# Altium PCB PCB1.PcbDoc (part 1 of 2)
Units mm, origin at the board's own origin, x right, y up, seen from the top; angles counter-clockwise.
Board outline 99.19 x 99.06 mm, 2 copper layers (Top Layer, Bottom Layer); 87 components, 74 nets, 377 pads, 55 vias.
Unrouted connection lines stored in the file: 5.
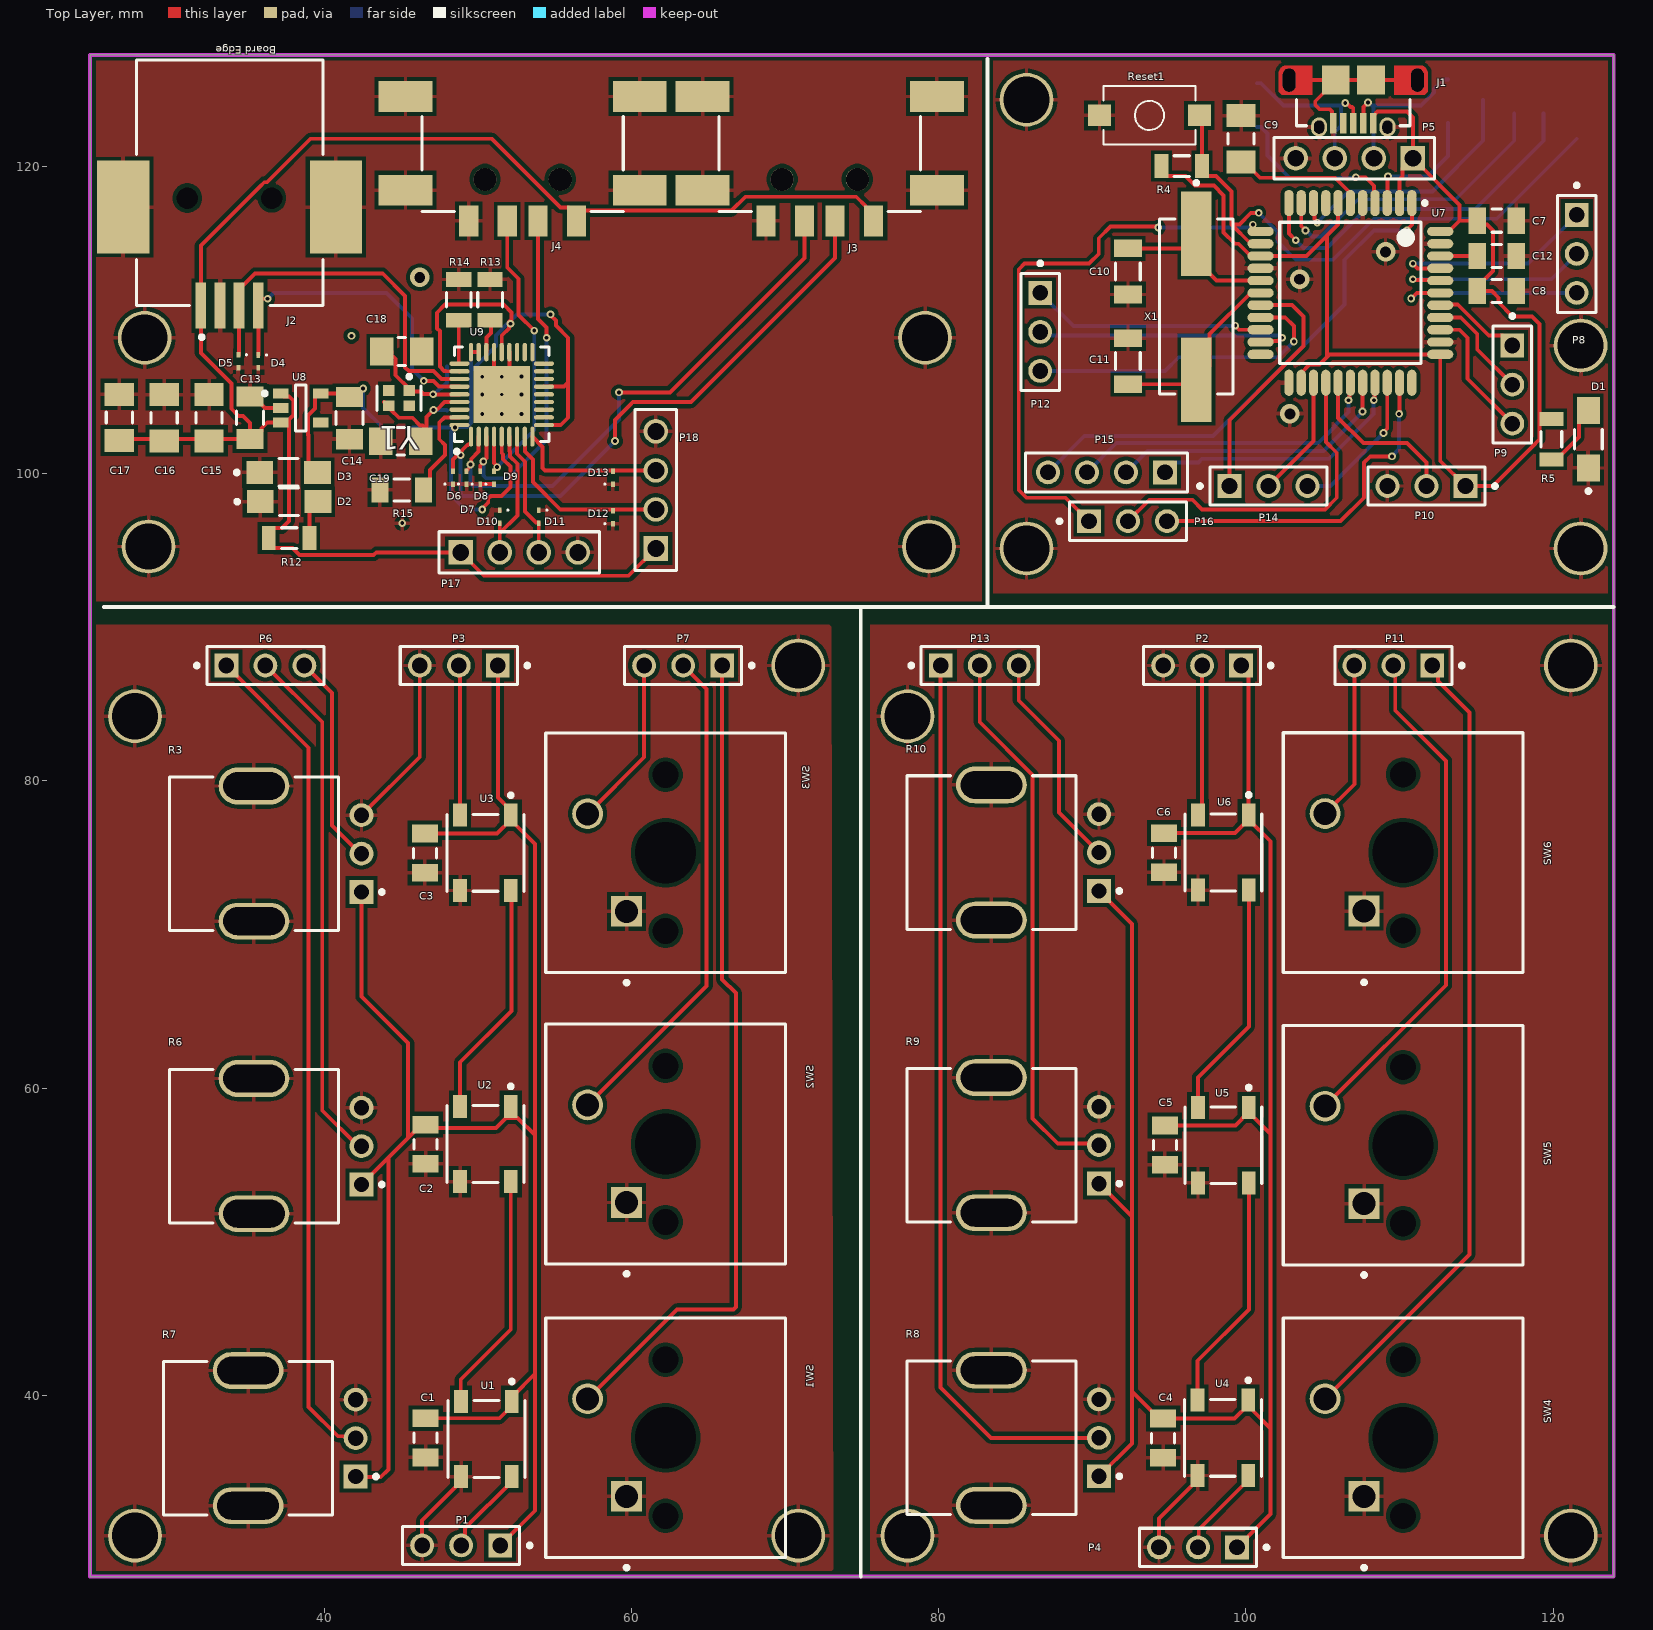
[diagram p0: Top Layer view]
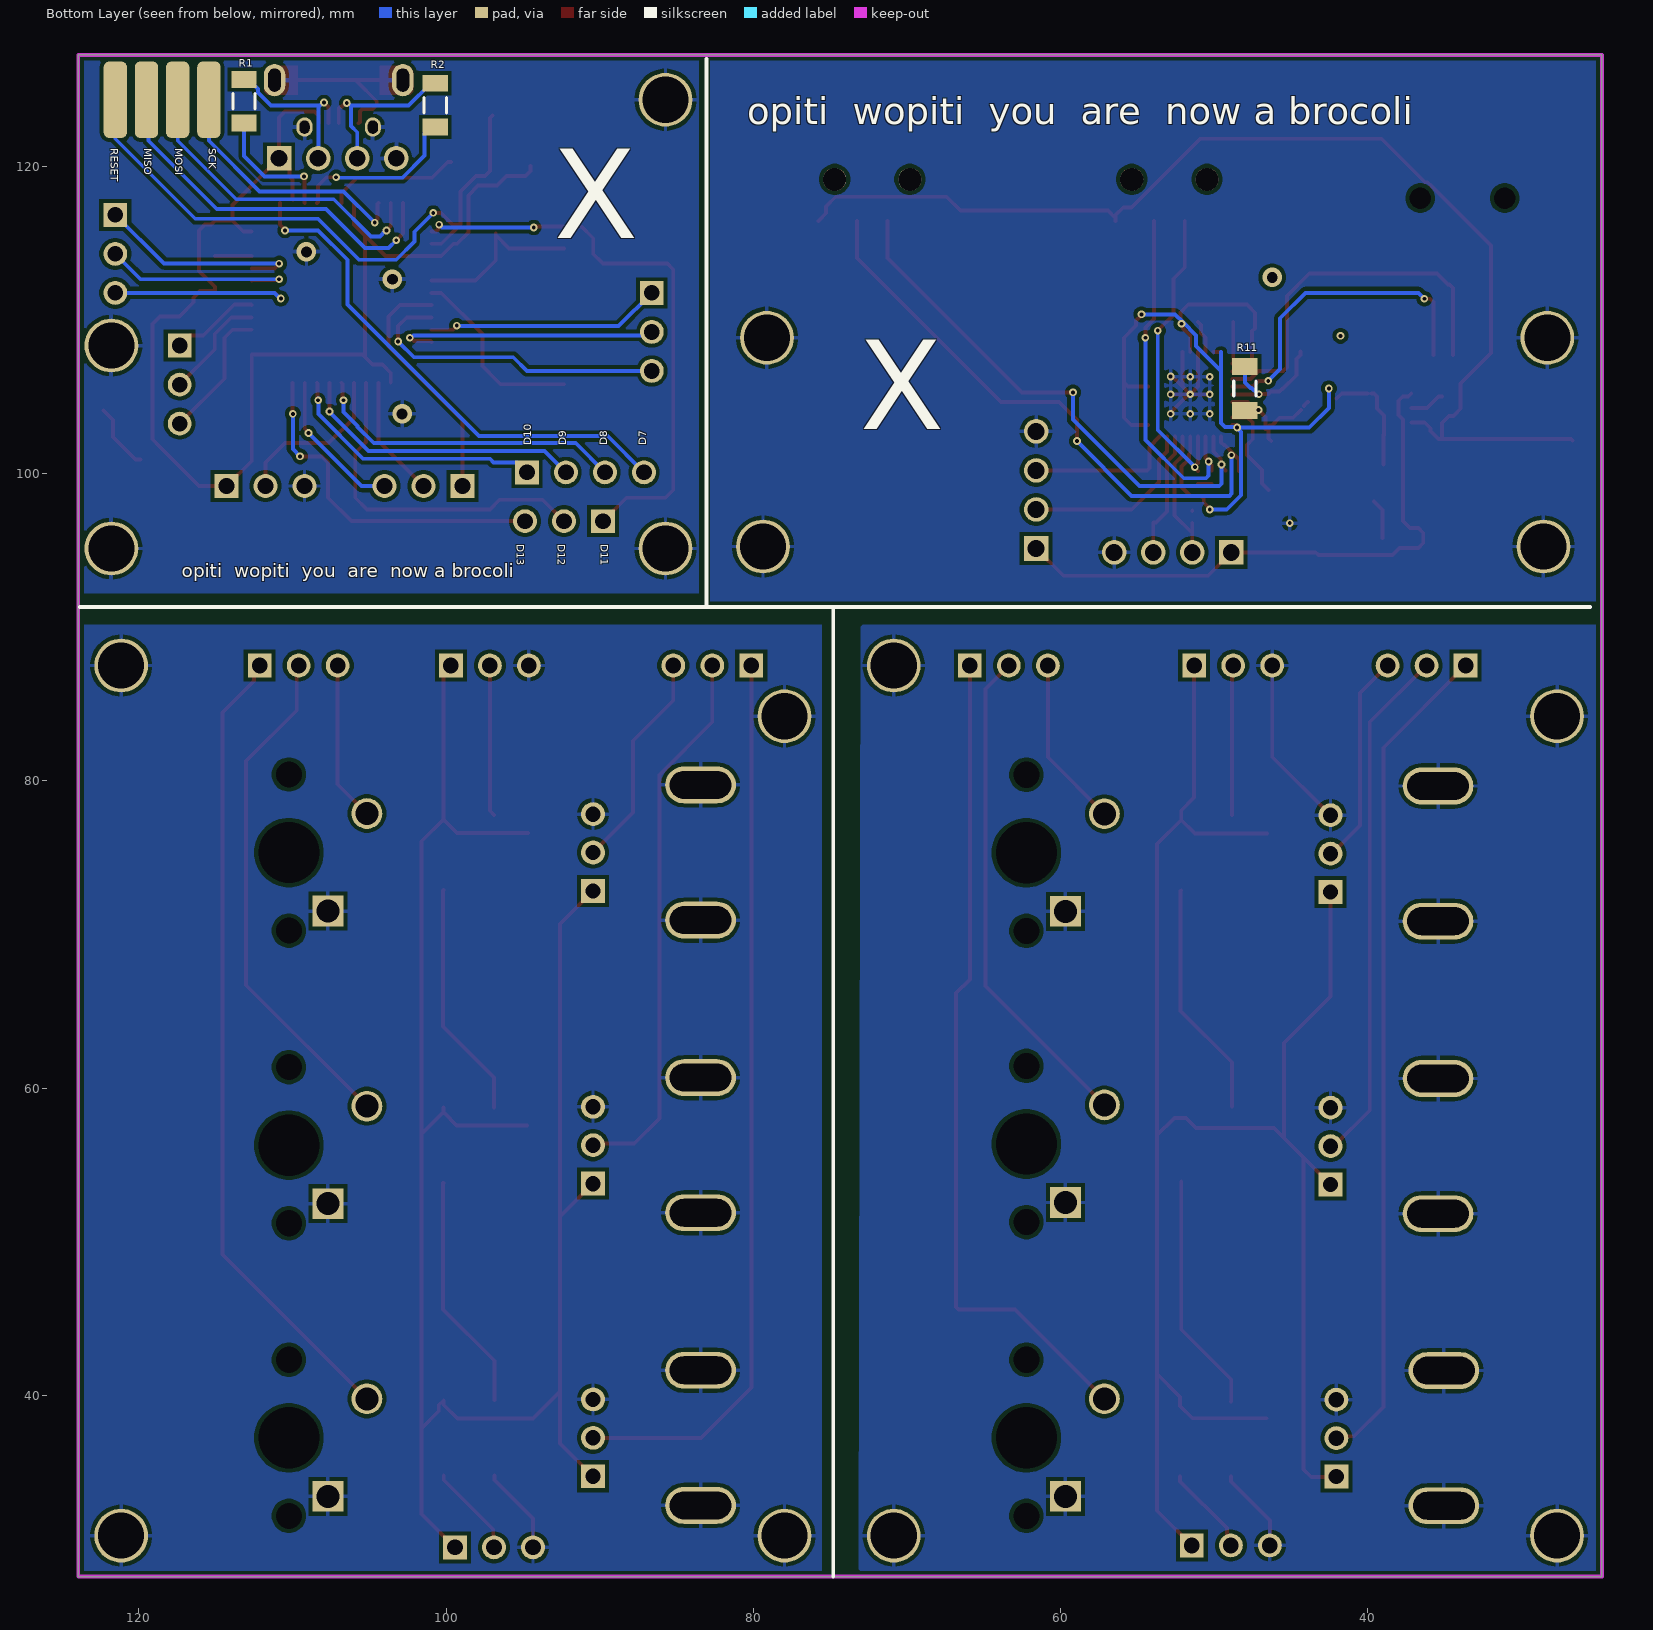
[diagram p1: Bottom Layer view, seen from below]
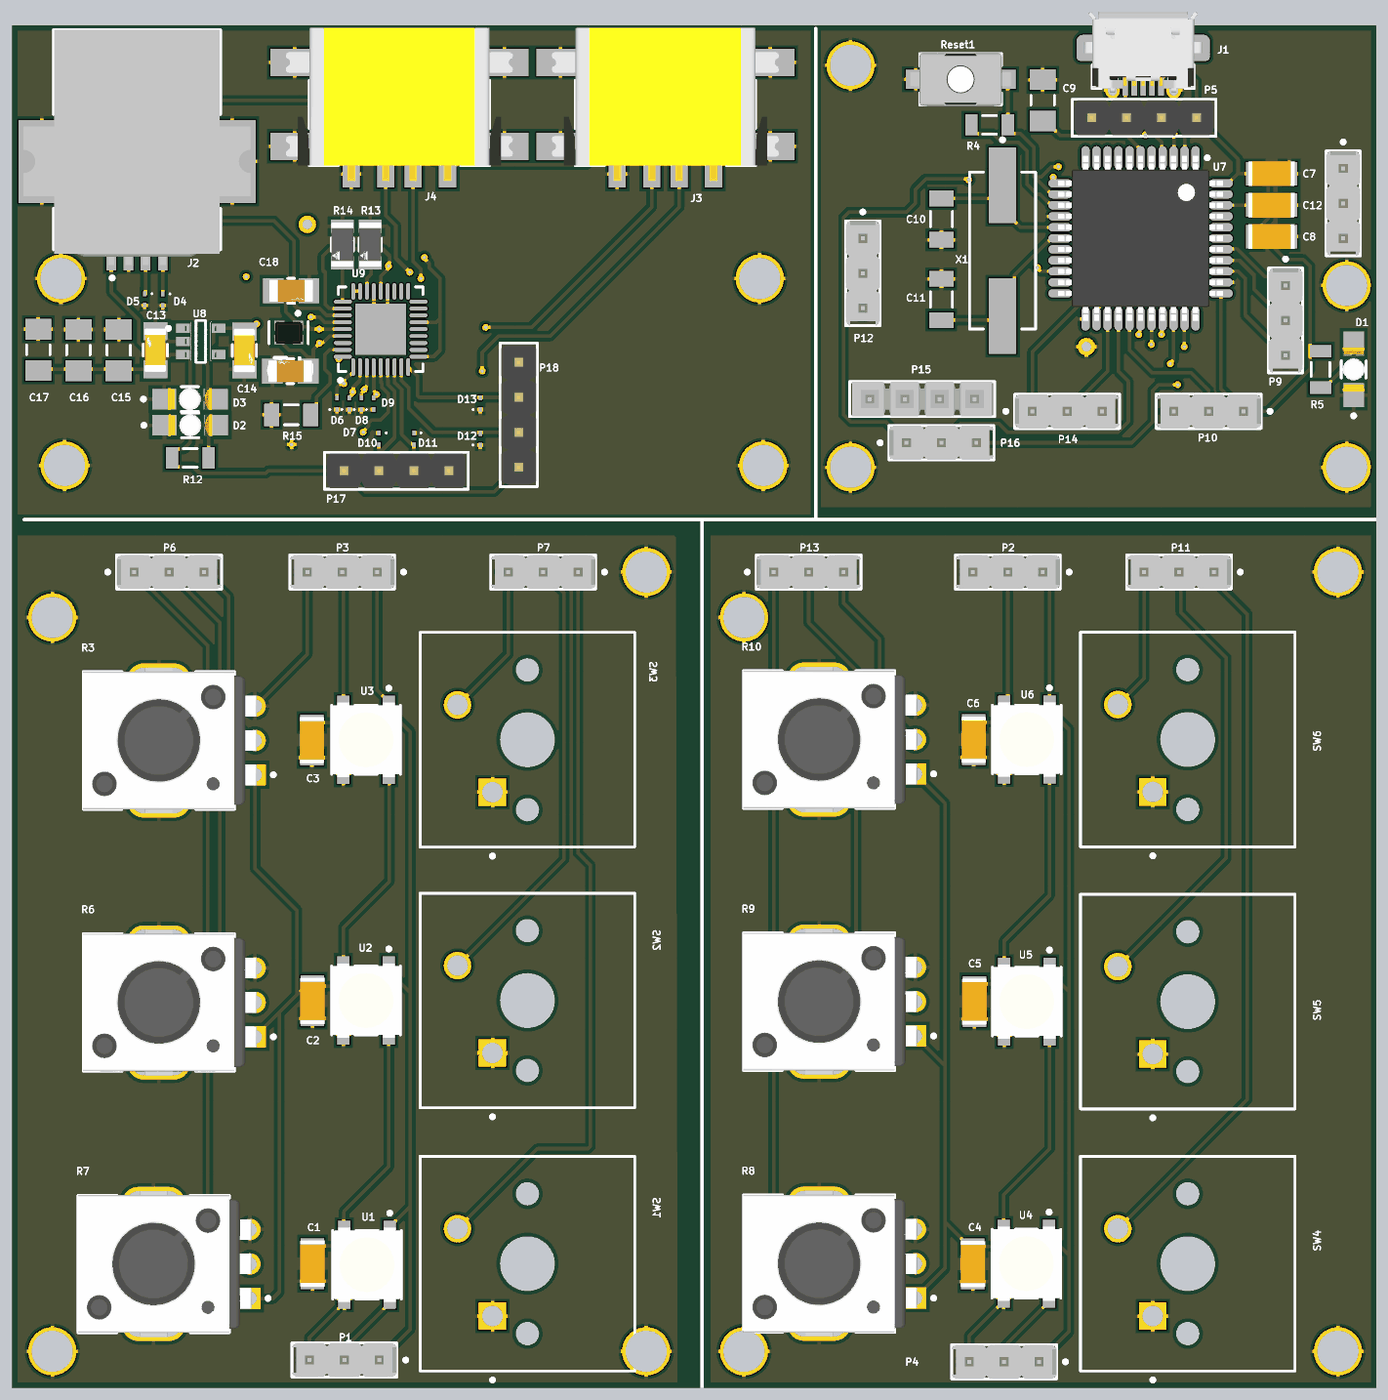
[diagram p2: 3D render of the assembled board from above, using the file's embedded part models]

## Layer stack, top to bottom
Top Solder: solder mask 0.0102, Solder Resist, Dk 3.5
Top Layer: signal copper 0.0356
Dielectric 1: dielectric 0.32, FR-4, Dk 4.8
Bottom Layer: signal copper 0.0356
Bottom Solder: solder mask 0.0102, Solder Resist, Dk 3.5

## Board outline
24.765,28.194 24.765,127.254 123.952,127.254 123.952,28.194

## Design rules (kind name [scope] priority, off if disabled: settings)
Clearance Clearance_1 [All] p1: gap=0.254 ignorepadtopadclearanceinfootprint=FALSE except(0: Arc-Hole Track-Hole SMDPad-Hole THPad-Hole Via-Hole Fill-Hole Poly-Hole Region-Hole Text-Hole)
Clearance [All] p2: gap=0.254 ignorepadtopadclearanceinfootprint=FALSE except(0: Arc-Hole Track-Hole SMDPad-Hole THPad-Hole Via-Hole Fill-Hole Poly-Hole Region-Hole Text-Hole; 0.2: Arc-Arc Arc-Track Arc-SMDPad Track-Track Track-SMDPad SMDPad-SMDPad SMDPad-THPad THPad-THPad)
PolygonConnect [All] p1: connectstyle=Relief reliefconductorwidth=0.254 reliefentries=4 polygonreliefangle="90 Angle" airgapwidth=0.254
RoutingVias [All] p1: holewidth=0.711 width=1.27 viastyle="Through Hole" minholewidth=0.2 minwidth=0.45 maxholewidth=0.711 maxwidth=1.27
SolderMaskExpansion [All] p1: expansion=0.102 istentingtop=FALSE
Width [All] p1: maxlimit=0.254 minlimit=0.254 preferedwidth=0.254
30 further rules are at their usual default settings.

## Classes and differential pairs
component class "usb HUB": C13 C14 C15 C16 C17 C18 C19 D2 D3 D4 D5 D6 D7 D8 D9 D10 D11 D12 D13 J2 J3 J4 P17 P18 R11 R12 R13 R14 R15 U8 U9 Y1
component class Deej: C1 C2 C3 C4 C5 C6 C7 C8 C9 C10 C11 C12 D1 J1 P1 P2 P3 P4 P5 P6 P7 P8 P9 P10 P11 P12 P13 P14 P15 P16 R1 R2 R3 R4 R5 R6 R7 R8 R9 R10 Reset1 SW1 SW2 SW3 SW4 SW5 SW6 U1 U2 U3 U4 U5 U6 U7 X1

## Components (designator, comment, footprint, x,y, rotation, side; value= is the part's Value field where it differs from the comment)
C1 "GRM31C5C1E104JA01L" CAPC3216X180X55LL20T25 46.61,37.23 r90 top
C2 "GRM31C5C1E104JA01L" CAPC3216X180X55LL20T25 46.604,56.34 r90 top
C3 "GRM31C5C1E104JA01L" CAPC3216X180X55LL20T25 46.56,75.291 r90 top
C4 "GRM31C5C1E104JA01L" CAPC3216X180X55LL20T25 94.615,37.211 r90 top
C5 "GRM31C5C1E104JA01L" CAPC3216X180X55LL20T25 94.733,56.288 r90 top
C6 "GRM31C5C1E104JA01L" CAPC3216X180X55LL20T25 94.675,75.318 r90 top
C7 "GRM31C5C1E104JA01L" CAPC3216X180X55LL20T25 116.332,116.459 r180 top
C8 "GRM31C5C1E104JA01L" CAPC3216X180X55LL20T25 116.332,111.887 r180 top
C9 "C1206C105K3RACTU" CAPC3216X180X50ML20T25 99.695,121.793 r90 top
C10 "CAP 22pF 50V 1206(3216)" CAPC1206(3216)100_N 92.329,113.157 r90 top value=22nF
C11 "CAP 22 pF 50V 1206(3216)" CAPC1206(3216)100_N 92.329,107.315 r270 top value=22nF
C12 "GRM31C5C1E104JA01L" CAPC3216X180X55LL20T25 116.332,114.173 r180 top
C13 "CL31B105MAHNNNE" FP-CL31-IPC_B 35.179,103.632 r90 top
C14 "CL31B105MAHNNNE" FP-CL31-IPC_B 41.656,103.611 r270 top
C15 "12061Z475KAT2A" CAPC3216X190X50ML20T25 32.512,103.632 r90 top
C16 "12061Z475KAT2A" CAPC3216X190X50ML20T25 29.591,103.632 r90 top
C17 "12061Z475KAT2A" CAPC3216X190X50ML20T25 26.67,103.656 r90 top
C18 "GRM31A7U2J180JW31D" FP-GRM31A-0_2-e0_3_0_95-IPC_B 45.054,107.95 r0 top
C19 "GRM31A7U2J180JW31D" FP-GRM31A-0_2-e0_3_0_95-IPC_B 44.989,102.108 r180 top
D1 "APTD3216CGCK" FP-APTD3216CGCK-MFG 122.301,102.235 r90 top
D2 "APTD3216CGCK" FP-APTD3216CGCK-MFG 37.719,98.171 r0 top
D3 "APTD3216CGCK" FP-APTD3216CGCK-MFG 37.689,100.072 r0 top
D4 "ESD9B3.3ST5G" ONSC-SOD-923-2-514AB-01_V 35.717,107.297 r270 top
D5 "ESD9B3.3ST5G" ONSC-SOD-923-2-514AB-01_V 34.417,107.315 r270 top
D6 "ESD9B3.3ST5G" ONSC-SOD-923-2-514AB-01_V 48.387,99.734 r90 top
D7 "ESD9B3.3ST5G" ONSC-SOD-923-2-514AB-01_V 49.276,99.734 r90 top
D8 "ESD9B3.3ST5G" ONSC-SOD-923-2-514AB-01_V 50.165,99.734 r90 top
D9 "ESD9B3.3ST5G" ONSC-SOD-923-2-514AB-01_V 51.054,99.734 r90 top
D10 "ESD9B3.3ST5G" ONSC-SOD-923-2-514AB-01_V 51.435,97.194 r270 top
D11 "ESD9B3.3ST5G" ONSC-SOD-923-2-514AB-01_V 53.975,97.194 r270 top
D12 "ESD9B3.3ST5G" ONSC-SOD-923-2-514AB-01_V 58.801,97.155 r90 top
D13 "ESD9B3.3ST5G" ONSC-SOD-923-2-514AB-01_V 58.801,99.734 r90 top
J1 "629105150921" 629105150921 106.995,125.61 r180 top
J2 "1734346-1" TECO-1734346-1_V 33.847,110.928 r90 top locked
J3 "629104190121" 629104190121 72.263,122.047 r180 top
J4 "629104190121" 629104190121 52.922,122.047 r180 top
P1 "22-28-4033" MOLX-22-28-4033_V 48.92,30.226 r180 top
P2 "22-28-4033" MOLX-22-28-4033_V 97.155,87.503 r180 top
P3 "22-28-4033" MOLX-22-28-4033_V 48.768,87.503 r180 top
P4 "22-28-4033" MOLX-22-28-4033_V 96.887,30.099 r180 top
P5 "61300411121" 61300411121 107.061,120.523 r180 top
P6 "22-28-4033" MOLX-22-28-4033_V 36.178,87.503 r0 top
P7 "22-28-4033" MOLX-22-28-4033_V 63.373,87.503 r180 top
P8 "22-28-4033" MOLX-22-28-4033_V 121.539,114.3 r270 top
P9 "22-28-4033" MOLX-22-28-4033_V 117.348,105.791 r270 top
P10 "22-28-4033" MOLX-22-28-4033_V 111.76,99.187 r180 top
P11 "22-28-4033" MOLX-22-28-4033_V 109.601,87.503 r180 top
P12 "22-28-4033" MOLX-22-28-4033_V 86.614,109.22 r270 top
P13 "22-28-4033" MOLX-22-28-4033_V 82.677,87.503 r0 top
P14 "22-28-4033" MOLX-22-28-4033_V 101.473,99.187 r0 top
P15 "TSW-104-08-T-S" SMTC-TSW-104-08-X-S 94.742,100.076 r180 top
P16 "22-28-4033" MOLX-22-28-4033_V 92.329,96.901 r0 top
P17 "61300411121" 61300411121 52.705,94.869 r0 top
P18 "61300411121" 61300411121 61.595,98.933 r90 top
R1 "ERJ-8GEYJ220V" RESC3216X70X50NL05T20 113.157,124.234 r270 bottom
R2 "ERJ-8GEYJ220V" RESC3216X70X50NL05T20 100.711,123.98 r270 bottom
R3 "PTV09A-4020U-B103" FP-PTV09A-4-MFG 35.433,75.261 r90 top value=10kΩ
R4 "ERJ-P08J103V" RESC3216X70X50LL05T20 95.83,120.015 r0 top
R5 "ERJ8ENF2203V" RESC3216X70X50LL05T20 119.888,102.235 r270 top
R6 "PTV09A-4020U-B103" FP-PTV09A-4-MFG 35.433,56.221 r90 top value=10kΩ
R7 "PTV09A-4020U-B103" FP-PTV09A-4-MFG 35.052,37.211 r90 top value=10kΩ
R8 "PTV09A-4020U-B103" FP-PTV09A-4-MFG 83.439,37.23 r90 top value=10kΩ
R9 "PTV09A-4020U-B103" FP-PTV09A-4-MFG 83.439,56.28 r90 top value=10kΩ
R10 "PTV09A-4020U-B103" FP-PTV09A-4-MFG 83.439,75.33 r90 top value=10kΩ
R11 "ERJ-8ENF1004V" RESC3216X70X50NL05T20 48.006,105.537 r270 bottom
R12 "ERJ8ENF2203V" RESC3216X70X50LL05T20 37.719,95.799 r0 top
R13 "CRCW120656K0FKEA" FP-CRCW1206-e3-IPC_C 50.8,111.308 r270 top
R14 "CRCW120656K0FKEA" FP-CRCW1206-e3-IPC_C 48.768,111.308 r270 top
R15 "ERJ-8GEYJ123V" RESC3216X70X50NL05T20 45.057,98.933 r180 top
Reset1 "434121025816" 434121025816 93.726,123.317 r0 top
SW1 "MX1A-11NW" CHRY-MX1A-11NW_V 62.23,37.23 r90 top
SW2 "MX1A-11NW" CHRY-MX1A-11NW_V 62.23,56.358 r90 top
SW3 "MX1A-11NW" CHRY-MX1A-11NW_V 62.23,75.311 r90 top
SW4 "MX1A-11NW" CHRY-MX1A-11NW_V 110.236,37.23 r90 top
SW5 "MX1A-11NW" CHRY-MX1A-11NW_V 110.236,56.28 r90 top
SW6 "MX1A-11NW" CHRY-MX1A-11NW_V 110.236,75.33 r90 top
U1 "WS2812B" ADAI-WS2812B_V 50.57,37.151 r270 top
U2 "WS2812B" ADAI-WS2812B_V 50.502,56.358 r270 top
U3 "WS2812B" ADAI-WS2812B_V 50.502,75.311 r270 top
U4 "WS2812B" ADAI-WS2812B_V 98.508,37.23 r270 top
U5 "WS2812B" ADAI-WS2812B_V 98.537,56.28 r270 top
U6 "WS2812B" ADAI-WS2812B_V 98.537,75.33 r270 top
U7 "ATMEGA32U4-AU" ATML-44ML_M 106.807,111.76 r270 top
U8 "MIC5504-3.3YM5-TR" FP-SOT23-5LD-PL-1-MFG 38.481,104.267 r0 top
U9 "USB2514B-AEZC" MCHP-QFN-36_V 51.562,105.156 r90 top
X1 "9C-3.6864MBBK-T" TXC-9C-2_V 96.774,110.871 r270 top
Y1 "Crys_Murata_XRCGB24M000F0L00R0_eec" Murata_XRCGB24M000F0L00R0_0 44.871,104.91 r180 top

## Footprints (in the part's own frame and the unit in brackets; to place one, negate y for a bottom-side part, rotate by r counter-clockwise, add the part's x,y. Pads: shape width x height; smd on the part's side, far side on the other; paste and mask are expansions set on the pad)
61300411121 [mm] "Pin Header, pitch 2.54 mm, THT, Vertical, single row, 4p"
  rect 1.6x1.6 hole 1.1: 1(-3.81,0)
  round 1.6 hole 1.1: 2(-1.27,0) 3(1.27,0) 4(3.81,0)
  silkscreen extent -5.23,-1.35 5.23,1.35, body extent -5.08,-1.27 5.08,1.27, height 8.57
434121025816 [mm] "6.0*3.8mm vertical type, SMD, height 2.5mm, black actuator, 160gf, T&R"
  rect 1.5x1.4 smd: 1(-3.25,0) 2(3.25,0)
  silkscreen extent -3,-1.9 3,1.9, body extent -3.65,-1.95 3.65,1.95, height 2.5
629104190121 [mm] "USB 2.0 Type A Horizontal SMT Short Type"
  rect 1.25x2 smd: 1(-3.5,5.6) 2(-1,5.6) 3(1,5.6) 4(3.5,5.6)
  round 1.5 hole 1.5 unplated: MH1(-2.45,2.9) MH2(2.45,2.9)
  rect 3.5x2 smd: Shell(-7.625,-2.5) Shell(-7.625,3.6) Shell(7.625,-2.5) Shell(7.625,3.6)
  silkscreen extent -6.55,-1.2 6.55,5, body extent -8.25,-5 8.25,6.11, height 6.35
629105150921 [mm] "Micro USB 2.0 Type AB Horizontal"
  rect 0.4x1.35 smd: 1(-1.3,2.805) 2(-0.65,2.805) 3(0,2.805) 4(0.65,2.805) 5(1.3,2.805)
  round 0 / inner oval 1.4x2.1 / far side oval 1.4x2.1 hole 0.825 slot 1.5 at 90 deg mask+0.102: Shell(-4.175,0)
  oval 1.05x1.25 hole 0.65 slot 0.85 at 90 deg: Shell(-2.225,3.055) Shell(2.225,3.055)
  rect 1.8x1.9 smd: Shell(-1.15,0) Shell(1.15,0)
  round 0 / inner round 0 / far side oval 1.4x2.1 hole 0.825 slot 1.5 at 90 deg mask+0.102: Shell(4.175,0)
  Top Layer region: 4.353,-0.95 4.544,-0.912 4.706,-0.804 4.814,-0.641 4.852,-0.45 4.852,-0.45 4.852,0.65 4.83,0.765 4.765,0.862 4.667,0.927 4.553,0.95 4.553,0.95 2.668,0.95 2.668,-0.95
  Top Layer region: -4.353,-0.95 -4.544,-0.912 -4.706,-0.804 -4.814,-0.641 -4.852,-0.45 -4.852,-0.45 -4.852,0.65 -4.83,0.765 -4.765,0.862 -4.667,0.927 -4.553,0.95 -4.553,0.95 -2.668,0.95 -2.668,-0.95
  silkscreen extent -3.7,1.25 3.7,2.97, body extent -4.3,-2.64 4.3,3.23, height 2.76
ADAI-WS2812B_V [mm] "SMD, 4-Leads, Body 5x5mm, Pitch 3.3mm"
  rect 1.5x0.9 smd: 1(-2.45,1.65) 2(-2.45,-1.65) 3(2.45,-1.65) 4(2.45,1.65)
  silkscreen extent -3.87,-2.5 2.5,2.5, body extent -2.7,-2.5 2.7,2.5, height 1.69
ATML-44ML_M [mm] "TQFP, 44-Leads, Body 10x10mm, Pitch 0.8mm, IPC Low Density"
  oval 1.7x0.6 smd: 1(-5.85,4) 2(-5.85,3.2) 3(-5.85,2.4) 4(-5.85,1.6) 5(-5.85,0.8) 6(-5.85,0) 7(-5.85,-0.8) 8(-5.85,-1.6) 9(-5.85,-2.4) 10(-5.85,-3.2) 11(-5.85,-4) 23(5.85,-4) 24(5.85,-3.2) 25(5.85,-2.4) 26(5.85,-1.6) 27(5.85,-0.8) 28(5.85,0) 29(5.85,0.8) 30(5.85,1.6) 31(5.85,2.4) 32(5.85,3.2) 33(5.85,4)
  oval 0.6x1.7 smd: 12(-4,-5.85) 13(-3.2,-5.85) 14(-2.4,-5.85) 15(-1.6,-5.85) 16(-0.8,-5.85) 17(0,-5.85) 18(0.8,-5.85) 19(1.6,-5.85) 20(2.4,-5.85) 21(3.2,-5.85) 22(4,-5.85) 34(4,5.85) 35(3.2,5.85) 36(2.4,5.85) 37(1.6,5.85) 38(0.8,5.85) 39(0,5.85) 40(-0.8,5.85) 41(-1.6,5.85) 42(-2.4,5.85) 43(-3.2,5.85) 44(-4,5.85)
  silkscreen extent -5.97,-4.6 4.6,4.98, body extent -6,-6 6,6, height 1.2
CAPC1206(3216)100_N [mm] "Chip Capacitor, Body 3.2x1.6mm, Height 1mm, IPC Medium Density"
  rect 1.15x1.8 smd: 1(-1.5,0) 2(1.5,0)
  silkscreen extent -0.55,-0.8 0.55,0.8, body extent -1.7,-0.9 1.7,0.9, height 1
CAPC3216X180X50ML20T25 [mm] "Chip Capacitor, 2-Leads, Body 3.40x1.80mm, IPC Low Density"
  rect 1.5x1.9 smd: 1(-1.5,0) 2(1.5,0)
  silkscreen extent -0.35,-0.85 0.35,0.85, body extent -1.7,-0.9 1.7,0.9, height 1.8
CAPC3216X180X55LL20T25 [mm] "Chip Capacitor, 2-Leads, Body 3.4x1.8mm, IPC High Density"
  rect 1.15x1.7 smd: 1(-1.275,0) 2(1.275,0)
  silkscreen extent -0.3,-0.75 0.3,0.75, body extent -1.7,-0.9 1.7,0.9, height 1.8
CAPC3216X190X50ML20T25 [mm] "Chip Capacitor, 2-Leads, Body 3.20x1.60mm, IPC Low Density"
  rect 1.5x1.9 smd: 1(-1.5,0) 2(1.5,0)
  silkscreen extent -0.35,-0.85 0.35,0.85, body extent -1.7,-0.9 1.7,0.9, height 1.9
CHRY-MX1A-11NW_V [mm] "THD, 2-Leads, Body 15.6x15.6mm"
  rect 2x2 hole 1.499 paste+0: 1(-3.81,2.54)
  round 2 hole 1.499 paste+0: 2(2.54,5.08)
  round 0 hole 3.988 unplated paste+0: MH1(0,0)
  round 0 hole 1.702 unplated paste+0: MH2(-5.08,0) MH3(5.08,0)
  silkscreen extent -8.57,-7.8 7.8,7.8, body extent -7.8,-7.8 7.8,7.8, height 15.2
FP-APTD3216CGCK-MFG [mm]
  rect 1.75x1.5 smd paste+0 mask+0: 1(-1.875,0) 2(1.875,0)
  silkscreen extent -3.5,-0.9 0.63,0.9, body extent -2.85,-1 2.85,1, height 0.25
FP-CL31-IPC_B [mm]
  rect 1.305x1.758 smd paste+0 mask+0: 1(-1.376,0) 2(1.376,0)
  silkscreen extent -0.42,-0.88 0.42,0.88, body extent -2.28,-1.13 2.28,1.13, height 0.25
FP-CRCW1206-e3-IPC_C [mm]
  rect 0.956x1.658 smd paste+0 mask+0: 1(-1.326,0) 2(1.326,0)
  silkscreen extent -0.47,-0.8 0.47,0.8, body extent -1.9,-0.97 1.9,0.97, height 0.25
FP-GRM31A-0_2-e0_3_0_95-IPC_B [mm]
  rect 1.504x1.806 smd paste+0 mask+0: 1(-1.301,0) 2(1.301,0)
  silkscreen extent -0.25,-0.9 0.25,0.9, body extent -2.3,-1.15 2.3,1.15, height 0.25
FP-PTV09A-4-MFG [mm]
  rect 1.55x1.55 hole 1 paste-1000 mask+0: 1(-2.5,-7)
  round 1.55 hole 1 paste-1000 mask+0: 2(0,-7) 3(2.5,-7)
  rrect100% 2.4x4.6 hole 4 slot 1.8 at 0 deg paste-1000 mask+0: 4(-4.4,0) 5(4.4,0)
  silkscreen extent -5,-8.45 5,5.5, body extent -5.8,-7.88 5.8,5.6, height 0.25
FP-SOT23-5LD-PL-1-MFG [mm]
  rect 1x0.66 smd paste+0 mask+0: 1(-1.3,0.95) 2(-1.3,0) 3(-1.3,-0.95) 4(1.3,-0.95) 5(1.3,0.95)
  silkscreen extent -2.47,-1.5 0.35,1.5, body extent -1.9,-1.6 1.9,1.6, height 0.25
MCHP-QFN-36_V [mm] "QFN, 36-Leads, Body 6.00x6.00mm, Pitch 0.50mm, Thermal Pad 3.70x3.70mm"
  oval 1.3x0.28 smd: 1(-2.75,2) 2(-2.75,1.5) 3(-2.75,1) 4(-2.75,0.5) 5(-2.75,0) 6(-2.75,-0.5) 7(-2.75,-1) 8(-2.75,-1.5) 9(-2.75,-2)
  oval 0.28x1.3 smd: 10(-2,-2.75) 11(-1.5,-2.75) 12(-1,-2.75) 13(-0.5,-2.75) 14(0,-2.75) 15(0.5,-2.75) 16(1,-2.75) 17(1.5,-2.75) 18(2,-2.75) 28(2,2.75) 29(1.5,2.75) 30(1,2.75) 31(0.5,2.75) 32(0,2.75) 33(-0.5,2.75) 34(-1,2.75) 35(-1.5,2.75) 36(-2,2.75)
  oval 1.2x0.28 smd: 19(2.75,-2) 20(2.75,-1.5) 21(2.75,-1) 22(2.75,-0.5) 23(2.75,0) 24(2.75,0.5) 25(2.75,1) 26(2.75,1.5) 27(2.75,2)
  rect 3.7x3.7 smd: 37(0,0)
  silkscreen extent -3.85,-3.08 3.08,3.08, body extent -2.95,-3 3.05,3, height 1
MOLX-22-28-4033_V [mm] "THD, 3-Leads, Body 7.62x2.49mm, Pitch 2.54mm"
  rect 1.55x1.55 hole 1.02: 1(-2.54,0)
  round 1.55 hole 1.02: 2(0,0) 3(2.54,0)
  silkscreen extent -4.59,-1.24 3.81,1.24, body extent -3.81,-1.24 3.81,1.24, height 8.38
Murata_XRCGB24M000F0L00R0_0 [mm]
  rect 0.75x0.7 smd paste+0 mask+0: 1(-0.675,-0.5) 2(-0.675,0.5) 2(0.675,-0.5) 3(0.675,0.5)
  silkscreen extent -1.43,-1.52 1.43,0.8, body extent -1.15,-0.95 1.15,0.95, height 0.72
ONSC-SOD-923-2-514AB-01_V [mm] "SOD, 2-Leads, Body 0.8x0.6mm"
  rect 0.36x0.25 smd: 1(-0.42,0) 2(0.42,0)
  silkscreen extent -0.47,0.48 -0.37,0.58, body extent -0.4,-0.3 0.4,0.3, height 0.4
RESC3216X70X50LL05T20 [mm] "Chip Resistor, 2-Leads, Body 3.20x1.60mm, IPC High Density"
  rect 0.9x1.55 smd: 1(-1.325,0) 2(1.325,0)
  silkscreen extent -0.5,-0.67 0.5,0.67, body extent -1.63,-0.82 1.62,0.82, height 0.7
RESC3216X70X50NL05T20 [mm] "Chip Resistor, 2-Leads, Body 3.20x1.60mm, IPC Medium Density"
  rect 1.1x1.65 smd: 1(-1.425,0) 2(1.425,0)
  silkscreen extent -0.5,-0.72 0.5,0.72, body extent -1.63,-0.82 1.62,0.82, height 0.7
SMTC-TSW-104-08-X-S [mm] ".025 SQ Post Terminal Strip Assembly, 1x4 Pins, Vertical, 2.54mm Pitch, Male"
  rect 1.55x1.55 hole 1.02: 1(0,0)
  round 1.55 hole 1.02: 2(2.54,0) 3(5.08,0) 4(7.62,0)
  silkscreen extent -1.46,-1.27 9.08,1.27, body extent -1.27,-1.27 8.89,1.27, height 8.38
TECO-1734346-1_V [mm] "SMD, 4-Leads, Body 12.04x16mm, Height 10.87 mm"
  rect 3x0.7 smd: 1(0,1.87) 2(0,-0.62) 3(0,-1.87) 4(0,0.62)
  rect 6.04x3.4 smd: 5(6.42,6.92) 6(6.42,-6.92)
  round 0.6 hole 1.4 unplated: MH(7,-2.75) MH(7,2.75)
  silkscreen extent -2.17,-6.07 16,6.07, body extent -1.1,-8.25 16,8.25, height 11.3
TXC-9C-2_V [mm] "SMD, 2-Leads, Body 11.4 x 4.8 mm, Height 4.1 mm"
  rect 5.5x2 smd: 1(-4.75,0) 2(4.75,0)
  silkscreen extent -8.17,-2.4 5.7,2.4, body extent -5.7,-2.4 5.7,2.4, height 4.1

## Part data
C1 C2 C3 C4 C5 C6 C7 C8 C12: library part CMP-2000-06343-1, "Chip Capacitor, 100 nF, +/- 5%, 25 V, -55 to 125 degC, 1206 (3216 Metric), RoHS, Tape and Reel", Capacitance=0.1µF, Capacitance Tolerance=±5%, Capacitor Case Style=1206[3216Metric], Capacitor Terminals=SMD, Dielectric Characteristic=C0G/NP0, Insulation Resistance=10000Mohm, Manufacturer=Murata, Operating Temperature Max=125°C, Operating Temperature Min=-55°C, Operating Temperature Range=-55°Cto+125°C, Package / Case=1206, Package Description="2-Pin Surface Mount Device, Body 3.2 x 1.6 mm", Temperature Coefficient=0ppm/°C±30ppm/°C, Tolerance +=5%, Voltage Rating=25V, Datasheet URL=https://datasheet.ciiva.com/3777/11308grm31c5c1e104ja0123-3777177.pdf, Datasheet Version=09/2014, External Length / Height=1mm, External Width=0.5mm, Lead Spacing=–, Manufacturer URL=http://www.murata.com/, Mounting Technology=SurfaceMount, MSL=–, No. of Pins=2, Package Reference=1206, Reel Quantity=2000, SVHC=NoSVHC(19-Dec-2012), Terminal Type=SurfaceMount(SMD,SMT), Tolerance -=5%, Voltage Rating V DC=25V
C9: library part CMP-2000-04991-1, "Chip Capacitor, 1 uF, +/- 10%, 25 V, -55 to 125 degC, 1206 (3216 Metric), RoHS, Tape and Reel", Capacitance=1uF, Capacitance - nF=1000nF, Case Code - in=1206, Case Code - mm=3216, Case Height=1.6mm, Case Length=3.2mm, Dielectric=X7R, Manufacturer=Kemet, Maximum Operating Temperature=+125C, Minimum Operating Temperature=-55C, Operating Temperature Range=-55Cto+125C, Package / Case=1206(3216metric), Package Description="2-Pin Surface Mount Device, Body 3.2 x 1.6 mm", Temperature Coefficient / Code=+/-15%, Tolerance=10%, Voltage Rating=25V, Brand=Kemet, Case Width=1.6mm, Class=Class1, Datasheet URL=https://ciiva.com/datasheet-click-18194173?src=ciiva&sig=6daff8c4, Datasheet Version=Jul-14, Dimensions=1.6mmWx3.2mmLx1.6mmH, Factory Pack Quantity=2000, Manufacturer URL=http://www.kemet.com/, Package Reference=1206, Packaging=Reel, Product=GeneralTypeMLCCs, Product Category=MultilayerCeramicCapacitorsMLCC-SMD/SMT, RoHS=Details, Series=C1206C, Termination Style=SMD/SMT, Type=SMDMLCCX7R6.3-250VDCCommericalGrade, Voltage Rating DC=25V
C10 C11: library part CMP-1037-03764-1, "CAP 22nF 50V ±5% 1206 (3216 Metric) Thickness 1mm SMD", Case-EIA=1206, Case-Metric=3216, Rated Voltage="50 V", Tolerance=Â±5%, Max Thickness="1 mm", Technology=SMT
C13 C14: library part CMP-13271-000122-1, "Cap Ceramic 1uF 25V X7R ±20% SMD 1206 +125°C Embossed T/R", Capacitance=1uF, Case Code (Imperial)=1206, Case Code (Metric)=3216, Dielectric=X7R, Max Operating Temperature=125°C, Min Operating Temperature=-55°C, Package Quantity=1, Tolerance=20%, Voltage Rating=25V, Case/Package=1206, Contact Plating=Tin, Depth=1.6mm, Height=1.6mm, Lead Free="Lead Free", Length=3.2mm, Mount="Surface Mount", Packaging="Tape and Reel", Radiation Hardening=No, Thickness=0.071inch, Voltage Rating (DC)=25V, Width=0.063inch
C15 C16 C17: library part CMP-2000-05019-1, "Chip Capacitor, 4.7 uF, +/- 10%, 100 V, -55 to 125 degC, 1206 (3216 Metric), RoHS, Tape and Reel", Capacitance=4.7µF, Capacitance Tolerance=±10%, Ceramic Capacitor Case=1206[3216Metric], Dielectric Characteristic=X7S, Manufacturer=AVX, Operating Temperature Max=125degC, Operating Temperature Min=-55degC, Voltage Rating=100V, Datasheet URL=https://datasheet.ciiva.com/22677/1789384-22677168.pdf, Datasheet Version=Oct-13, Manufacturer URL=http://www.avx.com/, MSL=MSL1-Unlimited, Packaging=CutTape, SVHC=NoSVHC(17-Dec-2015)
C18 C19: library part CMP-06035-014678-1, "Chip Multilayer Ceramic Capacitors for General Purpose, 1206, 18pF, U2J, -750ppm/°C, 5%, 630V", Capacitance=18pF, Case Code (Imperial)=1206, Case Code (Metric)=3216, Dielectric=U2J, Max Operating Temperature=125°C, Min Operating Temperature=-55°C, Package Quantity=4000, Tolerance=5%, Voltage Rating=630V, Case/Package=1206, Depth=1.6mm, Height=1mm, Lead Free="Lead Free", Length=3.2mm, Mount="Surface Mount", Packaging="Tape and Reel", Radiation Hardening=No, REACH SVHC="No SVHC", Termination=SMD/SMT, Thickness=0.039inch, Voltage Rating (DC)=630V, Width=0.063inch
D1 D2 D3: library part CMP-2000-05792-2, "LED GREEN CLEAR 2SMD", Case Code (Imperial)=1206, Case Code (Metric)=3216, Color=Green, Forward Current=20mA, Forward Voltage=2.1V, Lens Color=Clear, Max Operating Temperature=85°C, Min Operating Temperature=-40°C, Package Quantity=2000, Case/Package=1206, Dominant Wavelength=570nm, Height=1.8mm, Illumination Color=Green, Lead Free="Lead Free", Length=3.2mm, Lens Style=Clear, Luminous Intensity=300mcd, Mount="Surface Mount", Number of LEDs=1, Number of Pins=2, Packaging="Tape and Reel", Test Current=20mA, Viewing Angle=50°, Width=1.6mm
D4 D5 D6 D7 D8 D9 D10 D11 D12 D13: library part CMP-1063-00120-1, "Transient Voltage Suppressor, Micro-Packaged Diode for ESD Protection, 2-Pin SOD-923, Pb-Free, Tape and Reel", Manufacturer="On Semiconductor", ComponentLink1Description="Manufacturer URL", ComponentLink1URL=http://www.onsemi.com/, ComponentLink2Description=Datasheet, ComponentLink2URL=http://www.onsemi.cn/pub_link/Collateral/ESD9B-D.PDF, ComponentLink3Description="Package Specification", ComponentLink3URL=http://www.onsemi.com/pub_link/Collateral/514AB.PDF, DatasheetVersion="Rev. 2", Direction=Bidirectional, IR Max (uA)=1, Mounting Technology="Surface Mount", Number of Lines=1, PackageDescription="2-Pin SOD, Body 0.8 x 0.6 mm", PackageReference=SOD-923-2-514AB-01, PackageVersion="Rev. C, 03/2011", Packing="Tape and Reel", PartNumber=ESD9B3.3ST5G, RoHS=Pb-Free, V(BR) Min (V)=5, VRWM Max (V)=3.3
J1: library part CMP-1502-03249-1, "Micro USB 2.0 Type AB Receptacle WR-COM, Horizontal, SMT", Contact Resistance=30mOhm, Manufacturer="Wurth Elektronik", Operating Temperature=-40to85degC, Rated Current=1.8A, Working Voltage=30VAC, Connector Type=MicroUSB2.0TypeAB, Datasheet URL=https://katalog.we-online.de/em/datasheet/629105150921.pdf, Gender=Receptacle, Manufacturer URL=http://www.we-online.de, Mounting Technology=SMT, Orientation=Horizontal, Package Reference=629105150921, Packaging=TapeandReel, Part Number=629105150921, Publisher=WurthElektronik
J2: library part CMP-2000-07498-1, "USB-B Receptacle Connector, Height 10.87 mm, 0 to 50 degC, RoHS, Tray", Case\/Package=SMD/SMT, Flammability Rating=UL94V-0, Housing Colour=Black, Insulation Resistance=1GR, Manufacturer="TE Connectivity", Package Description="4-Pin Pin Surface Mount Device, Body 12.04 x 16 mm, Height 10.87 mm", Package Quantity=100, Connector Type=Receptacle, Contact Material=Bronze, Contact Plating=Gold, Datasheet URL=http://www.te.com/commerce/DocumentDelivery/DDEController?Action=srchrtrv&DocNm=1734346&DocType=Customer+Drawing&DocLang=English, Datasheet Version="Rev. C, 06/2011", Depth=16mm, ELV=Compliant, Gender=Receptacle, Housing Material=Nylon, Insulation Material=Thermoplastic, Length=16.5mm, Manufacturer URL=http://www.te.com/, Material=Bronze, Mount=Horizontal, Mounting Technology=SurfaceMount, Number of Contacts=4, Number of Ports=1, Number of Positions=4, Number of Terminals=4, Orientation=RightAngle, Package Reference=1734346-1, Packaging=Tray, Plating=Nickel, REACH SVHC=Unknown, RoHSCompliant=true, Termination=SMD/SMT
J3 J4: library part CMP-1502-03232-1, "USB 2.0 Type A Receptacle WR-COM, Horizontal, SMT, Short Type with Pads and Pegs", Contact Resistance=30mOhm, Manufacturer="Wurth Elektronik", Operating Temperature=-40to85degC, Rated Current=1.5A, Working Voltage=30VAC, Connector Type=USB2.0TypeA, Datasheet URL=https://katalog.we-online.de/em/datasheet/629104190121.pdf, Gender=Receptacle, Manufacturer URL=http://www.we-online.de, Mounting Technology=SMT, Orientation=Horizontal, Package Reference=629104190121, Packaging=TapeandReel, Part Number=629104190121, Publisher=WurthElektronik
P1 P2 P3 P4 P6 P7 P8 P9 P10 P11 P12 P13 P14 P16: library part CMP-1676-00001-5, "Male Header, Pitch 2.54 mm, 1 x 3 Position, Height 8.38 mm, Tail Length 3.18 mm, RoHS, Bulk", Colour=Black, Current Rating="4 A", Manufacturer=Molex, Max Operating Temperature="75 degC", Min Operating Temperature="0 degC", Package Quantity=1, Voltage Rating="250 V", ComponentLink1Description="Manufacturer URL", ComponentLink1URL=http://www.molex.com/, ComponentLink2Description=Datasheet, ComponentLink2URL=http://www.molex.com/pdm_docs/sd/022284033_sd.pdf, Contact Finish=Gold, Contact Material=Brass, Contact Plating=Gold, DatasheetVersion="Rev. G, 01/2012", Height="8.38 mm", Lead Pitch="0.1 inch", Length="7.62 mm", Mount="Through Hole", Mounting Technology="Through Hole", PackageDescription="Male Header, Pitch 2.54 mm, 1 x 3 Position, Height 8.38 mm, Tail Length 3.18 mm", PackageReference=22-28-4033, Packaging=Bulk, Pins=3, REACH SVHC=Unknown, RoHSCompliant=true, Rows=1
P5 P17 P18: library part CMP-1502-01064-1, "THT Vertical Pin Header WR-PHD, Pitch 2.54 mm, Single Row, 4 pins", Contact Resistance=20mOhm, Manufacturer="Wurth Elektronik", Operating Temperature=-40to105degC, Rated Current=3A, Withstanding Voltage=500VAC, Working Voltage=250VAC, Datasheet URL=https://katalog.we-online.de/em/datasheet/6130xx11121.pdf, Gender=Male, Manufacturer URL=http://www.we-online.de, Mounting Technology=THT, Orientation=Vertical, Package Reference=61300411121, Packaging=Bag, Part Number=61300411121, Pin Number=4, Pitch=2.54mm, Publisher=WurthElektronik, Row Number=Single
P15: library part CMP-1024-00356-1, "0.025\" SQ Post Header, Through-hole, Vertical, -55 to 105 degC, 2.54 mm Pitch, 4-Pin, Male, RoHS", Manufacturer=Samtec, Temperature Range="-55 to 105 degC", ComponentLink1Description="Manufacturer URL", ComponentLink1URL=http://www.samtec.com, ComponentLink2Description=Datasheet, ComponentLink2URL=http://www.samtec.com/documents/webfiles/pdf/TSW_TH.PDF, ComponentLink3Description="Package Specification", ComponentLink3URL=http://www.samtec.com/documents/webfiles/cpdf/TSW-XXX-XX-XXX-X-XX-XXX-MKT.pdf, DatasheetVersion=F-214, Mounting Technology=Through-hole, Orientation=Vertical, PackageDescription=".025[0.64] SQ. Post Terminal Strip Assembly", PackageReference=TSW-104-08-X-S, PackageVersion="DM, 8/1988", PartNumber=TSW-104-08-T-S, Pitch="2.54 mm", RoHS=True
R1 R2: library part CMP-2003-00585-1, Manufacturer=Panasonic, Part Number=ERJ-8GEYJ220V
R3 R6 R7 R8 R9 R10: library part CMP-07234-000013-1, "POT 10K OHM 1/20W CARBON LINEAR", Manufacturer="Bourns Inc.", Package=PTV09A-4, Power Rating=0.05W, Resistance=10kΩ, Temperature="-10°C to +50°C", Temperature Range High=+50°C, Temperature Range Low=-10°C, Tolerance=20%, Voltage Rating=50V, Automotive=No, Category=Res, ComponentLink2Description=Datasheet, ComponentLink2URL=https://www.bourns.com/docs/product-datasheets/ptv09.pdf?sfvrsn=5e1089f1_12, Composition=Carbon, Device Class L1="Passive Components", Device Class L2=Resistors, Device Class L3="Variable Resistors and Potentiometers", Digikey Description="POT 10K OHM 1/20W CARBON LINEAR", Height=20.5mm, Lead Free=Yes, Manufacturer Part Number=PTV09A-4020U-B103, Mouser Description="Potentiometers 10K LINEAR 20%", Octopart=https://octopart.com/ptv09a-4020u-b103-bourns-1878033, RoHS=TRUE, Series=PTV09
R4: library part CMP-2003-00715-1, Manufacturer=Panasonic, Part Number=ERJ-P08J103V
R5 R12: library part CMP-2003-00820-1, Manufacturer=Panasonic, Part Number=ERJ8ENF2203V
R11: library part CMP-2003-00020-1, Manufacturer=Panasonic, Part Number=ERJ-8ENF1004V
R13 R14: library part CMP-2003-02282-2, "RES Thick Film, 56kΩ, 1%, 0.25W, 100ppm/°C, 1206", Case Code (Imperial)=1206, Case Code (Metric)=3216, Max Operating Temperature=155°C, Max Power Dissipation=250mW, Min Operating Temperature=-55°C, Package Quantity=10, Resistance=56kR, Temperature Coefficient=100ppm/°C, Tolerance=1%, Voltage Rating=200V, Case/Package=1206, Composition="Thick Film", Contact Plating=Tin, Depth=1.6mm, Features="Automotive AEC-Q200", Height=0.55mm, Lead Free="Lead Free", Length=3.2mm, Military Standard=Not, Number of Pins=2, Number of Terminations=2, Packaging="Tape and Reel", Power Rating=250mW, Radiation Hardening=No, Termination=SMD/SMT, Voltage Rating (DC)=200V, Weight=0.000353oz, Width=0.063inch
R15: library part CMP-2003-00554-1, Manufacturer=Panasonic, Part Number=ERJ-8GEYJ123V
Reset1: library part CMP-1459-00004-1, "WS-TASV SMD Tact Switch 6.0X3.8 mm", Manufacturer="Wuerth Elektronik", ComponentLink1Description="Manufacturer URL", ComponentLink1URL=http://www.we-online.com, ComponentLink2Description=Datasheet, ComponentLink2URL=http://katalog.we-online.de/em/datasheet/434121025816.pdf, NoPins=02, PackageReference=434121025816, PartNumber=434121025816
SW1 SW2 SW3 SW4 SW5 SW6: library part CMP-2000-06786-1, "Keylock Switch, 12 V, -10 to 70 degC, 2-Pin THD, RoHS, Bulk", Actuator Color=N/A, Illumination Color=N/R, Manufacturer=Cherry, Maximum AC Voltage Rating=12V, Maximum Contact Resistance=200mOhm, Maximum Current Rating=0.01A, Minimum Insulation Resistance=100MOhm, Operating Force=0.58N, Operating Temperature=-10to70C, Package Description="2-Pin Through Hole Device, Body 15.6 x 15.6 mm", Part No=MX1A11NW, Actuator Length=3.6mm, Actuator Material=N/A, Actuator Style=Button, Body Orientation=Straight, Contact Material=Silver/Gold, Contact Plating=N/A, COO=UK, Datasheet URL=https://cdn.sparkfun.com/datasheets/Components/Switches/MX%20Series.pdf, Datasheet Version=09/2000, Dielectric Strength=N/A, Dimension=15.6x15.6x15.2mm, ECCN=EAR99, Electrical Life=50000000Cycle, Family=MX, Housing Material=N/A, HTS=8536509065, Illumination Type=N/R, IP Rating=N/A, Manufacturer URL=http://cherryswitches.com/cn/, Maximum DC Voltage Rating=12V, Maximum Power Rating=N/A, Mechanical Life=N/A, Mounting=ThroughHole, Mounting Technology=ThroughHole, Number of Terminals=2, Operating Speed=N/A, Package Reference=MX1A-11NW, Packaging=N/A, Pole Throw Configuration=SPST, RoHS=Unknown, Row Spacing=6.35mm, Supplier=CherryElectrical, Switch Configuration=N.O., Terminal Pitch=2.54mm, Terminal Type=PCPins, Total Travel=4.06mm, Type=DesktopProfile
U1 U2 U3 U4 U5 U6: library part CMP-007-00035-1, "Intelligent Control LED Integrated Light Source, 3.5 to 5.3 V, -25 to 80 degC, 4-Pin SMD, RoHS, Bulk", Manufacturer="Adafruit Industries", Package Description="4-Pin Surface Mount Device, Body 5 x 5 mm, Pitch 3.3 mm", Case/Package=WS2812B, Datasheet URL=https://cdn-shop.adafruit.com/datasheets/WS2812B.pdf, Datasheet Version=May-13, Manufacturer URL=https://www.adafruit.com/, Mounting Technology=SM, Package Reference=WS2812B, RoHS Compliant=False
U7: library part CMP-020-00016-2, "8-bit Microcontroller with 32 Kbytes of ISP Flash and USB Controller, 2.7 to 5.5 V, -40 to 85 degC, 44-Pin QFP, Tray", Case/Package=TQFP, Frequency=16MHz, Manufacturer=Atmel, Max Operating Temperature=85°C, Max Supply Voltage=5.5V, Min Operating Temperature=-40°C, Min Supply Voltage=2.7V, Package Description="44-Pin Thin Profile Plastic Quad Flat Papckage, Body 10 x 10 mm, Pitch 0.8 mm", Package Quantity=800, Package Reference=44ML, Package Version="Rev. J, 02/2014", ADC Channels=12, Datasheet URL=http://www.atmel.com/images/atmel-7766-8-bit-avr-atmega16u4-32u4_summary.pdf, Datasheet Version="Rev. 7766IS, 07/2015", Density=32KB, Ethernet Channels=0, I/Os=26, Interface=USART, Manufacturer URL=http://www.atmel.com/, Max Clock Frequency=16MHz, Mounting Technology=SM, Package URL=http://www.atmel.com/images/atmel-7766-8-bit-avr-atmega16u4-32u4_summary.pdf, Packaging=Tray, Pins=44, PWM Channels=8, RAM Size=2.5KB, RoHS Compliant=True
U8: library part CMP-2000-07604-2, "IC REG LINEAR 3.3V 300MA SOT23-5", Case/Package=SOT-23-5, Dropout Voltage=380mV, Max Input Voltage=5.5V, Max Operating Temperature=125°C, Max Output Current=300mA, Min Input Voltage=2.5V, Min Operating Temperature=-40°C, Nominal Output Voltage=3.3V, Operating Supply Current=42uA, Power Supply Rejection Ratio (PSRR)=60dB, Quiescent Current=38uA, Accuracy=3%, Height=1.1mm, Length=2.9mm, Mount="Surface Mount", Number of Outputs=1, Number of Pins=5, Output Current=300mA, Output Type=Fixed, Output Voltage=3.3V, Packaging="Tape and Reel", REACH SVHC="No SVHC", Width=1.6mm
U9: library part CMP-2000-05217-1, "USB 2.0 High-Speed Hub Controller, 4 Ports, 3 to 3.6 V, 0 to 85 degC, 36-Pin QFN, RoHS, Tray", Current - Supply=70mA, Manufacturer=Microchip, Operating Temperature=-, Package / Case=36-VFQFNExposedPad, Standard Package=490, Supplier Device Package=36-QFN(6x6), Voltage - Supply=3V~3.6V, Category=IntegratedCircuits(ICs), Datasheet URL=http://ww1.microchip.com/downloads/en/DeviceDoc/00001692C.pdf, Datasheet Version="DS00001692C, 10/2015", Family=Interface-Controllers, Function=-, Interface=I²CEEPROM,SMBus(2-Wire,I²C), Manufacturer Part Number=USB2514B-AEZC, Manufacturer URL=http://www.microchip.com/, Other Names=638-1122, Packaging=Tray, Protocol=-, Series=-, Standards=-
X1: library part CMP-0724-00001-1, "9C Series Quartz Crystal, 3.6864 MHz, +/-50 ppm, 20 pF, -40 to 85 degC, 2-Pin 11.4 x 4.8 x 4.1 mm SMD, RoHS, Tape and Reel", Frequency="3.6864 MHz", Frequency Stability (over Temp.)="+/-50 ppm (-20 to 70 degC)", Frequency Tolerance (at 25 degC)="+/-50 ppm", Load Capacitance="20 pF", Manufacturer=TXC, Operating Temperature Range="-40 to 85 degC", ComponentLink1Description="Manufacturer URL", ComponentLink1URL=http://www.txccrystal.com/, ComponentLink2Description=Datasheet, ComponentLink2URL=http://www.txccrystal.com/images/pdf/9c.pdf, ComponentLink3Description="Package Specification", ComponentLink3URL=http://www.txccrystal.com/images/pdf/9c.pdf, DatasheetVersion=Jun-10, Mounting Technology="Surface Mount", PackageDescription="2-Pin SMD, Body 11.4 x 4.8 mm, Height 4.1 mm", PackageReference=9C-2, PackageVersion=Jun-10, Packing="Tape and Reel", PartNumber=9C-3.6864MBBK-T, RoHS=TRUE
Y1: "CRYS 24MHz ±100ppm Crystal 6pF 150 Ohm -30°C ~ 85°C Surface Mount 4-SMD, No Lead", Digikey Part Number=490-5575-1-ND, Equivalent Series Resistance(max.)=150Ω, Frequency=24.0000MHz, Frequency Aging="±50ppm max.", Frequency Tolerance="±100ppm max. (25±3℃)", Load Capacitance=6pF, Manufacturer=Murata, Mouser Part Number=81-XRCGB24M000F0L0R0, Package=SMT_2MM0_1MM6, Part Number=XRCGB24M000F0L00R0, Temperature="-30°C to +85°C", Temperature Range High=+85°C, Temperature Range Low=-30°C, ComponentLink1Description=Upverter, ComponentLink1URL=https://upverter.com/upn/revision/aff6462790ac0861/, ComponentLink2Description=Datasheet, ComponentLink2URL=http://www.murata.com/~/media/webrenewal/support/library/catalog/products/timingdevice/crystalu/p79e.ashx, Digikey Description="CRYS 24MHz ±100ppm Crystal 6pF 150 Ohm -30°C ~ 85°C Surface Mount 4-SMD, No Lead", Drive Level(max.)=300μW, Frequency Shift by Temperature="±50ppm max.", helpURL=https://upverter.com/upn/revision/aff6462790ac0861/, Lead Free=yes, Price=0.196763354289, RoHS=TRUE, Supplier 1=Digi-Key, Supplier 2=Mouser, Supplier Part Number 1=490-5575-1-ND, Supplier Part Number 2=81-XRCGB24M000F0L0R0

## Free pads (board coordinates)
  rrect50% 1.524x5 smd far side: 3(115.443,124.333) 3(117.475,124.333) 3(119.507,124.333) 3(121.539,124.333)
  round 3.5 hole 3: 4(27.686,30.861) 4(27.686,84.201) 4(28.321,108.839) 4(28.575,95.25) 4(70.866,30.861) 4(70.866,87.503) 4(77.978,30.861) 4(77.978,84.201) 4(79.121,108.839) 4(79.375,95.25) 4(85.725,95.123) 4(85.725,124.333) 4(121.158,30.861) 4(121.158,87.503) 4(121.793,95.123) 4(121.793,108.331)

## Via types
v1: diameter 0.5, hole 0.254, Top Layer to Bottom Layer, 50 vias
v2: diameter 1.27, hole 0.711, Top Layer to Bottom Layer, 4 vias
v3: diameter 0.5, hole 0.2, Top Layer to Bottom Layer, 1 vias

## Nets (pads, with @x,y where several pads share a name; then routed paths per layer and width w, separated by ;. In a path a pad name is that pad's centre, name@x,y a point inside that pad or via, vN(x,y) a via of type N, cw(c..) or ccw(c..) an arc to the next point about the centre after c; other vN are vias at no path point)
+3.3V: C14.1 D3.2 U8.5 U9.5 U9.10 U9.15 U9.23 U9.26 U9.27 U9.29 U9.36 | length 66
  Top Layer w0.254: D3.2@38.972,100.584 38.972,102.498 38.954,102.516 38.954,103.782 39.408,104.236 39.408,105.014 39.611,105.217 U8.5 ; U8.5@40.035,105.217 41.701,105.217 C14.1@42.037,104.881 ; v1(48.514,102.997) 48.514,103.144 48.526,103.156 U9.36 ; U9.29 48.807,106.661 47.934,106.661 47.905,106.689 47.809,106.689 47.535,106.963 47.535,109.269 47.349,109.455 47.349,110.468 47.879,110.998 51.695,110.998 52.21,110.483 52.21,110.029 v1@52.034,109.853 ; U9.27 U9.26 ; v1(50.292,97.663) 50.292,97.73 50.684,98.122 50.684,98.364 50.864,98.543 51.546,98.543 52.124,99.121 52.124,100.447 51.641,100.93 51.641,101.259 51.567,101.333 51.567,102.401 U9.5 ; U9.23 51.567,107.911 51.567,108.979 52.034,109.446 v1@52.034,109.853 ; v1(52.133,109.754) v1@52.034,109.853 ; U9.10 54.787,103.156 55.404,103.156 55.88,103.632 55.88,105.918 ; U9.15 54.787,105.656 55.618,105.656 55.88,105.918 ; v1(54.737,110.363) 54.737,110.296 55.082,109.951 55.082,109.637 55.88,108.839 55.88,105.918
  Bottom Layer w0.254: v1(42.545,105.537) 42.545,104.267 43.815,102.997 v1(48.514,102.997) ; 49.562,107.906 49.562,106.68 ; v1(50.292,97.663) 49.185,97.663 48.26,98.588 48.26,102.702 48.514,102.956 v1(48.514,102.997) ; v1(52.133,109.754) v1@52.034,109.853 ; v1(54.737,110.363) 52.544,110.363 v1@52.034,109.853 ; v1(48.514,102.997) 48.552,103.035 49.314,103.035 49.562,103.283 49.562,106.68 ; 49.562,106.68 51.181,108.299 51.181,109 v1@52.034,109.853
+5: C13.1 C15.1 C16.1 C17.1 J2.1 J3.1 J4.1 P17.1 P18.1 R12.1 U8.1 U8.3 | length 114
  Top Layer w0.254: C17.1 26.77,102.256 29.591,102.256 32.512,102.256 C13.1 ; U8.3 36.3,103.317 35.931,102.948 35.931,102.781 35.405,102.256 C13.1 ; U8.1 37.384,105.014 37.734,105.014 38.008,104.74 38.008,103.802 37.719,103.513 37.719,96.901 37.265,96.447 36.717,96.447 36.394,96.124 R12.1 36.394,95.474 36.717,95.151 37.946,95.151 38.4,94.697 43.225,94.697 43.397,94.869 P17.1 50.419,93.345 59.817,93.345 P18.1 ; J4.1 J4.1@56.422,116.622 ; J3.1 75.265,116.945 75.265,117.394 74.643,118.016 67.419,118.016 66.523,117.12 56.92,117.12 J4.1@56.422,116.622 ; C13.1 35.179,103.289 34.714,103.755 34.438,103.755 33.973,104.22 33.973,105.854 31.977,107.85 J2.1 31.977,114.837 35.833,118.692 36.104,118.963 36.286,118.963 39.116,121.793 50.927,121.793 51.001,121.719 55.4,117.32 55.924,117.32 56.422,116.822 J4.1@56.422,116.622
alim: C4.2 C5.2 C6.2 P2.1 P4.1 R8.1 R9.1 R10.1 U4.1 U5.1 U6.1 | length 127.4
  Top Layer w0.254: R8.1 92.583,36.874 92.583,40.243 ; R9.1 92.583,51.636 ; R10.1 92.583,70.686 92.583,51.636 ; C6.2 99.3,76.593 U6.1@100.187,77.48 ; C5.2 99.319,57.563 U5.1@100.187,58.43 ; P4.1 101.6,32.272 101.6,37.846 ; P2.1 100.187,87.011 U6.1 U6.1@100.187,77.48 ; U5.1 U5.1@100.187,58.43 ; 92.583,40.243 92.583,51.636 ; 92.583,40.243 94.34,38.486 C4.2 99.264,38.486 100.158,39.38 U4.1 100.481,39.357 100.481,38.965 101.6,37.846 ; U5.1@100.187,58.43 101.6,57.017 ; U6.1@100.187,77.48 101.6,76.067 101.6,57.017 ; 101.6,37.846 101.6,57.017
AREF: C12.2 U7.42 | length 2.4
  Top Layer w0.254: U7.42 115.044,114.16 C12.2
D7: P15.4 U7.1 | length 33.5
  Top Layer w0.254: v1(110.49,115.824) 110.49,115.877 110.807,116.194 U7.1
  Bottom Layer w0.254: P15.4 89.481,102.435 97.863,102.435 106.426,110.998 106.426,113.919 108.331,115.824 v1(110.49,115.824)
D8: P15.3 U7.28 | length 20.6
  Top Layer w0.254: v1(106.68,104.775) 106.68,104.842 106.741,104.902 106.741,105.844 U7.28
  Bottom Layer w0.254: P15.3 91.567,101.981 104.712,101.981 105.768,103.037 105.768,103.101 106.68,104.013 v1(106.68,104.775)
D9: P15.2 U7.29 | length 18.9
  Top Layer w0.254: v1(107.595,104.043) 107.601,104.049 107.601,105.904 U7.29
  Bottom Layer w0.254: P15.2 93.599,101.473 105.061,101.473 107.595,104.008 v1(107.595,104.043)
D10: P15.1 U7.30 | length 17.2
  Top Layer w0.254: v1@108.331,104.902 108.369,104.94 108.369,105.872 U7.30
  Bottom Layer w0.254: P15.1 95.39,100.724 96.914,100.724 97.155,100.965 105.41,100.965 108.316,103.871 108.316,104.887 v1@108.331,104.902
  other v1: 108.331,104.775
D11: P16.1 U7.12 | length 37.7
  Top Layer w0.254: P16.1 88.265,98.425 85.725,98.425 85.217,98.933 85.217,113.284 85.598,113.665 89.789,113.665 90.424,114.3 90.424,115.316 91.186,116.078 94.234,116.078 v1(94.297,116.014) ; v1(100.457,116.205) 100.495,116.167 100.495,115.92 100.654,115.76 U7.12
  Bottom Layer w0.254: v1(94.297,116.014) 100.266,116.014 v1(100.457,116.205)
D12: P16.2 U7.26 | length 22.5
  Top Layer w0.254: P16.2 93.726,98.298 96.52,98.298 97.155,97.663 105.156,97.663 105.918,98.425 105.918,101.352 105.207,102.063 U7.26
D13: P16.3 U7.32 | length 22.7
  Top Layer w0.254: P16.3 106.172,96.901 107.696,98.425 107.696,100.711 108.101,101.116 v1(109.511,101.116) ; v1(109.982,103.886) 109.994,103.898 109.994,105.897 U7.32
  Bottom Layer w0.254: v1(109.511,101.116) 109.982,101.588 v1(109.982,103.886)
D+: D4.1 J2.3 U9.31 | length 21.2
  Top Layer w0.254: D4.1 35.717,110.039 35.717,111.156 35.94,111.379 v1(36.322,111.379) ; v1(46.49,106.037) 46.497,106.03 47.121,106.03 47.489,105.661 48.807,105.661 U9.31
  Bottom Layer w0.254: v1(36.322,111.379) 36.703,111.76 44.069,111.76 45.72,110.109 45.72,106.807 v1(46.49,106.037)
D+Deej: R2.2 U7.4 | length 11.3
  Top Layer w0.254: v1@107.159,119.236 v1(107.159,119.289) 107.787,119.289 108.341,118.735 108.341,117.676 U7.4
  Bottom Layer w0.254: R2.2 100.986,122.555 101.409,122.132 101.409,120.695 102.847,119.257 v1@107.159,119.257
D-: D5.1 J2.2 U9.30 | length 24.7
  Top Layer w0.254: D5.1@34.467,107.709 34.467,110.039 34.467,112.078 34.69,112.301 34.778,112.301 35.232,112.755 35.238,112.755 35.513,113.03 43.815,113.03 45.276,111.569 45.276,106.911 45.519,106.668 47.124,106.668 47.631,106.161 48.807,106.161 U9.30
D-Deej: R1.2 U7.3 | length 8.4
  Top Layer w0.254: U7.3 109.23,117.633 109.23,119.324 v1(109.253,119.347)
  Bottom Layer w0.254: v1(109.253,119.347) 109.258,119.342 111.829,119.342 113.157,120.67 R1.2
GND: C1.1 C2.1 C3.1 C4.1 C5.1 C6.1 C7.1 C8.1 C9.2 C10.1 C11.1 C12.1 C13.2 C14.2 C15.2 C16.2 C17.2 C18.2 C19.2 D1.1 D2.1 D3.1 D4.2 D5.2 D6.1 D7.1 D8.1 D9.1 D10.1 D11.1 D12.1 D13.1 J1.5 J1.Shell J2.4 J2.5 J2.6 J3.4 J3.Shell J4.4 J4.Shell P1.3 P2.3 P3.3 P4.3 P5.4 P10.3 P17.4 P18.4 pad.4 R3.3 R3.4 R3.5 R6.3 R6.4 R6.5 R7.3 R7.4 R7.5 R8.3 R8.4 R8.5 R9.3 R9.4 R9.5 R10.3 R10.4 R10.5 R13.1 R14.1 R15.2 Reset1.1 SW1.1 SW2.1 SW3.1 SW4.1 SW5.1 SW6.1 U1.3 U2.3 U3.3 U4.3 U5.3 U6.3 U7.5 U7.15 U7.23 U7.35 U7.43 U8.2 U9.22 U9.24 U9.37 | length 50
  Top Layer w0.254: C13.2 35.405,105.008 36.147,104.267 U8.2 ; R3.3 46.228,81.556 P3.3 ; P1.3 46.38,31.861 48.92,34.401 U1.3 ; D8.1 D9.1 ; v1(50.292,105.156) v3(51.562,105.156) ; U9.24@51.067,107.901 U9.24 51.062,105.656 v3(51.562,105.156) ; D10.1@51.435,97.563 D10.1 ; U9.22 U9.37@52.062,105.656 ; v1(52.843,106.313) 52.719,106.313 U9.37@52.062,105.656 ; U9.37@52.959,103.886 51.689,105.156 v3(51.562,105.156) ; U9.37@52.959,105.156 v3(51.562,105.156) ; P4.3 94.347,31.968 96.858,34.48 U4.3 ; 102.82,125.61 J1.Shell@105.845,125.61 ; J1.5 105.622,122.878 105.622,123.563 105.473,123.712 104.788,123.712 104.521,123.979 104.521,124.236 105.845,125.56 J1.Shell@105.845,125.61 ; 111.17,125.61 108.145,125.61 J1.Shell@105.845,125.61 ; v3(51.562,105.156) U9.37@52.062,105.656
  other v1: 45.085,96.774 50.292,103.886 51.562,103.886 52.843,103.886 52.843,105.156 50.292,106.299 51.562,106.299
  other v2: 102.87,103.886 103.505,112.649 109.093,114.427
LEDIN: P10.2 U7.27 | length 11.3
  Top Layer w0.254: U7.27 106.007,103.826 106.007,103.629 107.655,101.981 110.49,101.981 111.76,100.711 P10.2 111.436,99.187 P10.2@111.241,99.187
M1: P12.1 U7.20 | length 15.4
  Top Layer w0.254: v1(99.314,109.626) 99.314,109.601 99.555,109.36 U7.20
  Bottom Layer w0.254: P12.1 88.773,109.601 99.289,109.601 v1(99.314,109.626)
M2: P12.2 U7.21 | length 17.4
  Top Layer w0.254: U7.21 101.023,108.626 102.083,108.626 102.295,108.839 v1(102.362,108.839)
  Bottom Layer w0.254: P12.2 86.839,108.995 102.139,108.995 102.295,108.839 v1(102.362,108.839)
M3: P12.3 U7.19 | length 20.7
  Top Layer w0.254: U7.19 102.565,110.16 103.124,109.601 103.124,108.596 v1(103.128,108.592)
  Bottom Layer w0.254: P12.3 94.742,106.68 95.631,107.569 102.105,107.569 v1(103.128,108.592)
M4: P14.1 U7.18 | length 16.1
  Top Layer w0.254: P14.1 98.933,103.473 102.547,107.087 102.555,107.087 103.759,108.291 103.759,110.216 103.015,110.96 U7.18
M5: P14.2 U7.25 | length 7.9
  Top Layer w0.254: P14.2 104.407,102.121 U7.25
M6: P14.3 U7.31 | length 9.8
  Top Layer w0.254: v1(108.966,102.643) 108.966,102.696 109.207,102.937 U7.31
  Bottom Layer w0.254: P14.3 105.51,99.187 v1(108.966,102.643)
MISO: pad.3@119.507,124.333 U7.11 | length 23.6
  Top Layer w0.254: U7.11 102.807,115.633 v1(103.251,115.189)
  Bottom Layer w0.254: v1(103.251,115.189) 103.759,114.681 105.283,114.681 107.823,117.221 114.935,117.221 119.38,121.666 pad.3@119.38,123.444
MOSI: pad.3@117.475,124.333 U7.10 | length 20
  Top Layer w0.254: U7.10 103.607,116.103 v1(103.886,115.824)
  Bottom Layer w0.254: v1(103.886,115.824) 103.939,115.824 104.32,115.443 104.902,115.443 107.315,117.856 113.665,117.856 117.475,121.666 pad.3@117.475,123.444
NetD1_2: D1.2 R5.2 | length 4.4
  Top Layer w0.254: R5.2 120.213,100.91 121.678,102.375 121.678,103.487 D1.2
NetD2_2: D2.2 R12.2 | length 2.6
  Top Layer w0.254: R12.2 39.044,97.621 D2.2
NetD6_2: D6.2 J3.2 U9.1 | length 39.6
  Top Layer w0.254: D6.2 48.387,100.921 v1@48.747,101.281 ; v1(48.891,101.199) 48.829,101.199 v1@48.747,101.281 ; U9.1 49.562,102.034 49.38,101.852 49.318,101.852 v1@48.747,101.281 ; v1(58.942,102.114) 58.942,103.497 59.944,104.499 60.093,104.648 63.871,104.648 73.263,114.04 J3.2
  Bottom Layer w0.254: v1(48.891,101.199) 48.866,101.174 48.866,98.701 49.015,98.552 55.38,98.552 v1(58.942,102.114)
NetD7_2: D7.2 J3.3 U9.2 | length 35.2
  Top Layer w0.254: D7.2@49.278,100.207 49.483,100.412 49.483,100.543 49.577,100.637 49.577,100.951 50.057,101.431 50.057,102.401 U9.2 ; v1(59.197,105.283) 62.506,105.283 71.263,114.04 J3.3
  Bottom Layer w0.254: v1(49.53,100.59) 49.53,99.336 49.679,99.187 54.864,99.187 59.197,103.52 v1(59.197,105.283)
NetD8_2: D8.2 J4.2 U9.3 | length 23
  Top Layer w0.254: D8.2@50.167,100.207 50.167,100.524 50.369,100.726 v1(50.369,100.779) 50.369,100.832 50.562,101.025 U9.3 ; J4.2 53.922,110.067 54.483,109.506 v1(54.483,108.839)
  Bottom Layer w0.254: v1(50.369,100.779) 50.369,99.872 50.546,99.695 51.986,99.695 54.483,102.192 v1(54.483,108.839)
NetD9_2: D9.2 J4.3 U9.4 | length 19.8
  Top Layer w0.254: D9.2@51.052,100.156 D9.2 ; U9.4 51.062,100.684 51.265,100.481 v1(51.265,100.414) ; J4.3 51.922,113.424 52.664,112.681 52.664,110.313 v1(53.677,109.3)
  Bottom Layer w0.254: v1(51.265,100.414) 53.677,102.826 v1(53.677,109.3)
NetD10_2: D10.2 P17.2 U9.6 | length 8.9
  Top Layer w0.254: P17.2 51.435,95.233 51.435,96.139 ; D10.2 51.435,96.139 ; U9.6 52.067,102.401 52.067,101.475 52.095,101.447 52.095,101.118 52.578,100.635 52.578,97.282 51.435,96.139
NetD11_2: D11.2 P17.3 U9.7 | length 8.2
  Top Layer w0.254: U9.7 52.567,102.401 52.567,101.289 53.086,100.77 53.086,97.536 53.795,96.827 53.973,96.827 53.975,96.825 D11.2 P17.3
NetD12_2: D12.2 P18.2 U9.8 | length 11.9
  Top Layer w0.254: U9.8 53.067,102.401 53.067,101.431 53.594,100.904 53.594,99.441 55.372,97.663 58.801,97.663 P18.2
NetD13_2: D13.2 P18.3 U9.9 | length 9.8
  Top Layer w0.254: U9.9 54.229,101.739 54.229,100.352 54.378,100.203 58.801,100.203 P18.3
NetJ1_2: J1.2 P5.2 R1.1 | length 10.9
  Top Layer w0.254: J1.2 107.658,122.818 107.658,123.861 v1(107.95,124.153)
  Bottom Layer w0.254: v1(107.95,124.153) 108.003,124.153 108.204,123.952 ; P5.2 108.314,120.54 108.314,123.952 111.391,123.952 112.251,124.812 112.251,125.028 112.882,125.659 R1.1
NetJ1_3: J1.3 P5.3 R2.1 | length 11.7
  Top Layer w0.254: v1(106.475,124.126) 106.541,124.126 106.806,123.861 106.92,123.861 106.995,123.786 J1.3
  Bottom Layer w0.254: R2.1 100.986,125.405 102.439,123.952 106.197,123.952 ; P5.3 105.791,122.217 106.197,122.623 106.197,123.952 ; v1(106.475,124.126) 106.408,124.126 106.234,123.952 106.197,123.952
NetP1_2: P1.2 U1.4 | length 5.8
  Top Layer w0.254: P1.2 49.168,30.474 49.168,31.349 52.22,34.401 U1.4
NetP2_2: P2.2 U6.2 | length 9.8
  Top Layer w0.254: U6.2 97.155,78.048 P2.2
NetP3_2: P3.2 U3.2 | length 9.7
  Top Layer w0.254: U3.2 P3.2@48.852,87.503
NetP4_2: P4.2 U4.4 | length 6
  Top Layer w0.254: P4.2 96.933,30.146 96.933,31.255 100.158,34.48 U4.4
NetP6_1: P6.1 R7.2 | length 54.4
  Top Layer w0.254: P6.1 38.989,82.152 38.989,39.243 40.896,37.336 41.927,37.336 R7.2
NetP6_2: P6.2 R6.2 | length 34
  Top Layer w0.254: P6.2@36.195,87.503 39.878,83.82 39.878,58.547 42.204,56.221 R6.2
NetP6_3: P6.3 R3.2 | length 13.8
  Top Layer w0.254: P6.3 40.513,85.708 40.513,77.089 42.341,75.261 R3.2
NetP7_1: P7.1 SW1.2 | length 55.2
  Top Layer w0.254: SW1.2 62.973,45.593 66.653,45.593 66.802,45.742 66.802,66.178 65.913,67.067 P7.1 P7.1@66.561,86.855
NetP7_2: P7.2 SW2.2 | length 32.4
  Top Layer w0.254: SW2.2 64.897,66.645 64.897,85.979 P7.2
NetP7_3: P7.3 SW3.2 | length 11.2
  Top Layer w0.254: SW3.2 60.833,81.534 P7.3
NetP8_1: P8.1 U7.41 | length 13.9
  Top Layer w0.254: v1(110.871,113.665) 111.176,113.36 U7.41
  Bottom Layer w0.254: v1(110.871,113.665) 118.364,113.665 P8.1
NetP8_2: P8.2 U7.40 | length 13.2
  Top Layer w0.254: v1(110.871,112.649) 110.909,112.611 112.606,112.611 U7.40
  Bottom Layer w0.254: v1(110.871,112.649) 119.888,112.649 P8.2
NetP8_3: P8.3 U7.39 | length 13
  Top Layer w0.254: v1@110.744,111.379 111.125,111.76 U7.39
  Bottom Layer w0.254: v1(110.764,111.392) 110.817,111.392 111.185,111.76 P8.3
NetP9_1: P9.1 U7.38 | length 5.8
  Top Layer w0.254: U7.38 112.695,110.998 113.792,110.998 115.811,108.979 116.7,108.979 P9.1
NetP9_2: P9.2 U7.37 | length 7.1
  Top Layer w0.254: U7.37 113.988,110.16 115.062,109.086 115.062,108.077 P9.2
NetP9_3: P9.3 U7.36 | length 8.8
  Top Layer w0.254: U7.36 113.906,109.36 114.427,108.839 114.427,106.172 P9.3
NetP11_1: P11.1 SW4.2 | length 52.6
  Top Layer w0.254: SW4.2 114.554,49.168 114.554,84.455 112.513,86.496 112.513,87.131 P11.1
NetP11_2: P11.2 SW5.2 | length 33.4
  Top Layer w0.254: SW5.2 113.03,66.694 113.03,81.28 109.728,84.582 109.728,87.376 P11.2
NetP11_3: P11.3 SW6.2 | length 10.4
  Top Layer w0.254: SW6.2 107.061,79.775 P11.3
NetP13_1: P13.1 R8.2 | length 58.7
  Top Layer w0.254: P13.1 80.137,40.513 83.42,37.23 R8.2